# Altium PCB JacdacDevRgbEc30 117.PcbDoc (part 2 of 2)
Units mm, origin at the board's own origin, x right, y up, seen from the top; angles counter-clockwise.
Board outline 28 x 25 mm, 2 copper layers (Top Layer, Bottom Layer), stack 1.525 mm thick; 29 components, 28 nets, 109 pads, 40 vias.
Unrouted connection lines stored in the file: 10.
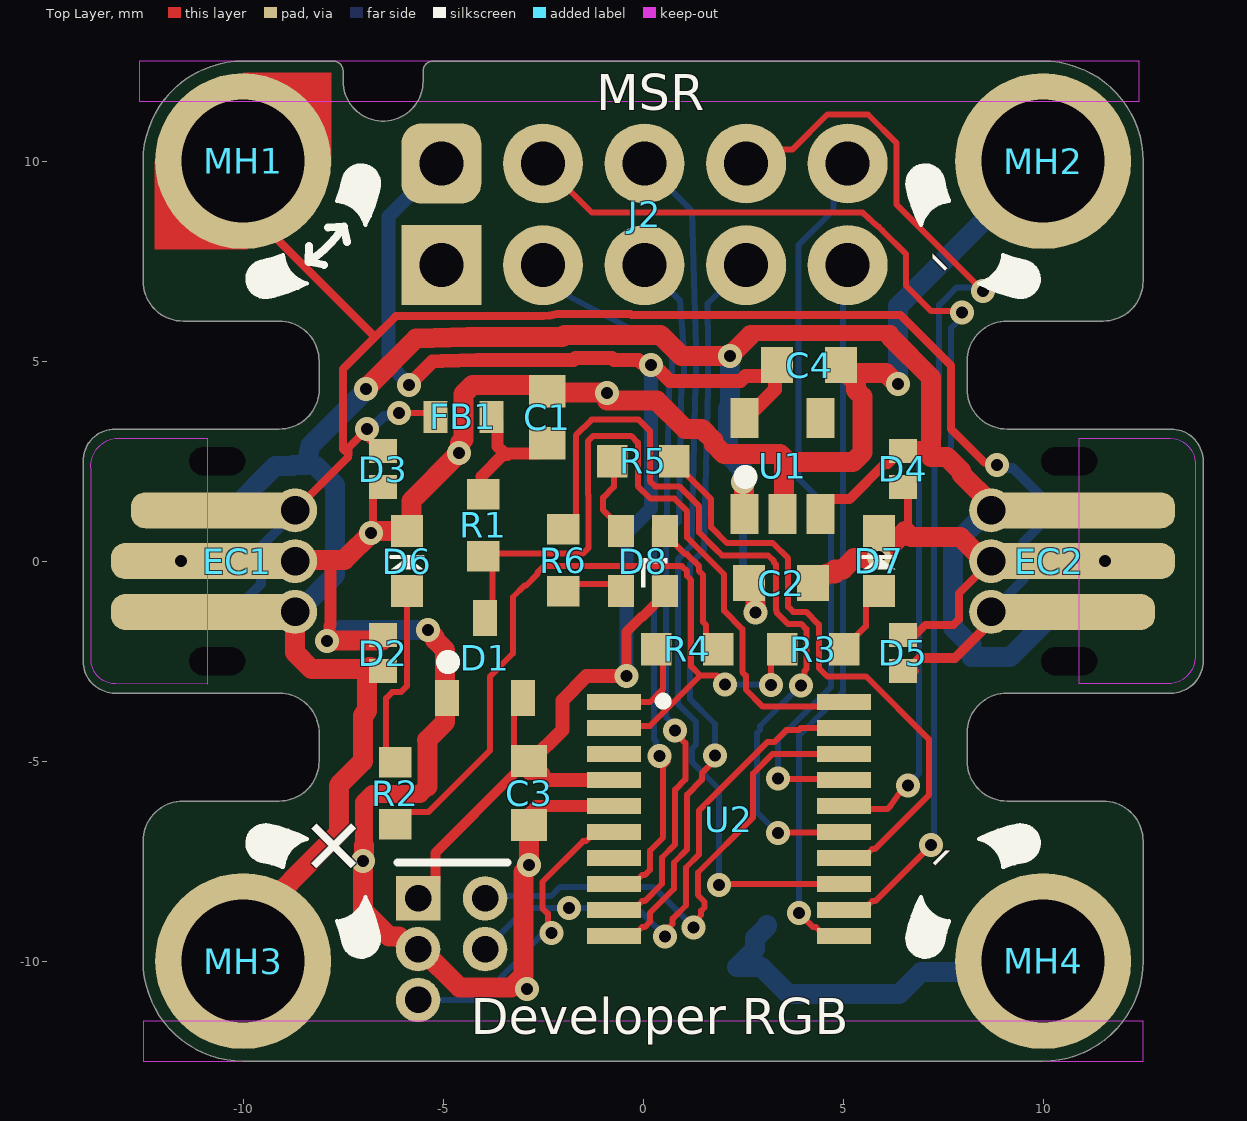
[diagram p0: Top Layer view]

## Silkscreen, mask and mechanical layers (free items; w line width, h text height) (continued)
Fabrication notes: (continued)
  text "non-plated slots x2" at -27.299,-0.407 h1.7
  text "non-plated slots x2" at 16.679,-0.407 h1.7
  text "Fabrication Notes" at 37.025,-5.385 h1.7
Top Courtyard:
  drawing of 196 lines, arcs and shapes, not listed
Mechanical 9:
  lines w0.01: 25.07,10.305 ccw(c22.745,10.35) 25.07,10.35
Board Outline:
  lines w0.2: -14,-2.5 ccw(c-13.2,-2.5) -13.2,-3.3 -9.1,-3.3 ; -14,-2.47 -14,2.47 ; -14,2.5 cw(c-13.2,2.5) -13.2,3.3 -9.1,3.3 ; -12.5,-7 cw(c-11.5,-7) -11.5,-6 -9.1,-6 ccw(c-9.1,-5) -8.1,-5 -8.1,-4.3 ccw(c-9.1,-4.3) -9.1,-3.3 ; -12.5,-6.97 -12.5,-10 ccw(c-10,-10) -10,-12.5 10,-12.5 ccw(c10,-10) 12.5,-10 12.5,-7 ccw(c11.5,-7) 11.5,-6 9.1,-6 cw(c9.1,-5) 8.1,-5 8.1,-4.3 cw(c9.1,-4.3) 9.1,-3.3 13.2,-3.3 ; -12.5,6.97 -12.5,10 cw(c-10,10) -10,12.5 -7.75,12.5 cw(c-7.75,12.25) -7.5,12.25 -7.5,12 ccw(c-6.5,12) -5.5,12 -5.5,12.25 cw(c-5.25,12.25) -5.25,12.5 10,12.5 cw(c10,10) 12.5,10 12.5,7 cw(c11.5,7) 11.5,6 9.1,6 ccw(c9.1,5) 8.1,5 8.1,4.3 ; -12.5,7 ccw(c-11.5,7) -11.5,6 -9.1,6 cw(c-9.1,5) -8.1,5 -8.1,4.3 ; -9.098,3.3 ccw(c-9.098,4.3) -8.098,4.3 ; 8.098,4.3 ccw(c9.098,4.3) 9.098,3.3 ; 9.1,3.3 13.2,3.3 cw(c13.2,2.5) 14,2.5 14,-2.5 cw(c13.2,-2.5) 13.2,-3.3
  text "Board Outline" at 37.025,-6.785 h1.7
Top Assy:
  text "Top Assy" at 15.001,-8.175 h1.7
Bottom Assy:
  text "Bottom Assy" at 15,-9.575 h1.7
Drill Drawing:
  text "Drill Drawing" at 23.6,-12.475 h1.7
Component Keepout Dwg:
  text "Component Keepout" at 37.026,-11.097 h1.7
Routing Keepout Dwg:
  text "Routing Keepout" at 37.1,-12.475 h1.7

## Text inside footprints (layer, text, board x,y; h text height)
EC1: Mechanical 9 "Jacdac / cable connector  / body" at -18.158,-4.821 h1.7 r90
EC2: Mechanical 9 "Jacdac / cable connector  / body" at 18.158,4.821 h1.7 r270